# EAGLE board rotaryDisplayBoard (EAGLE 9.6.2)
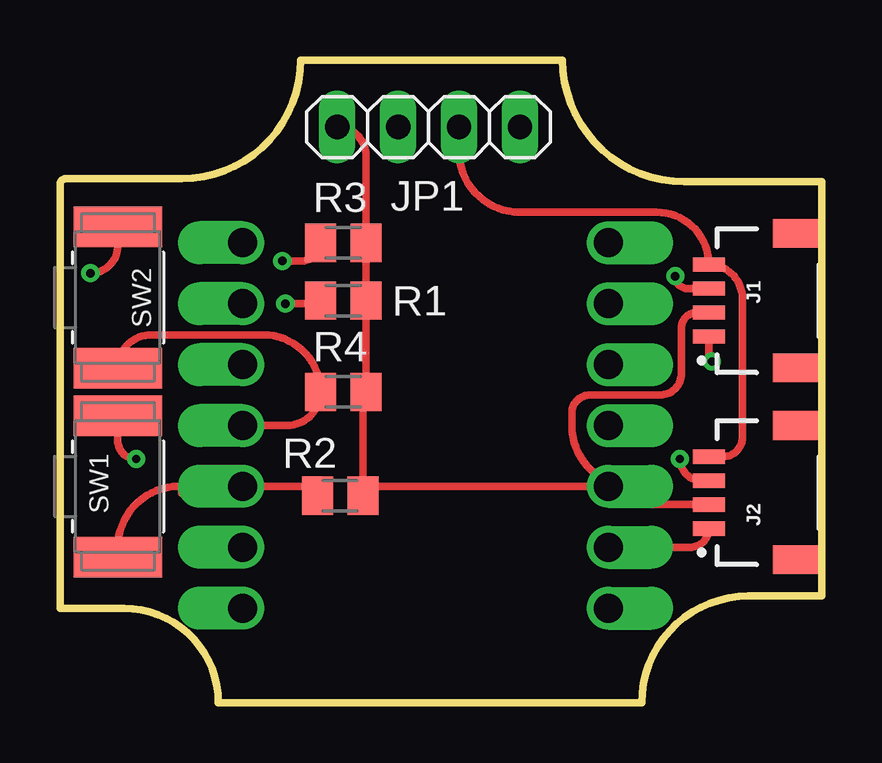
[diagram p0: board, top side]
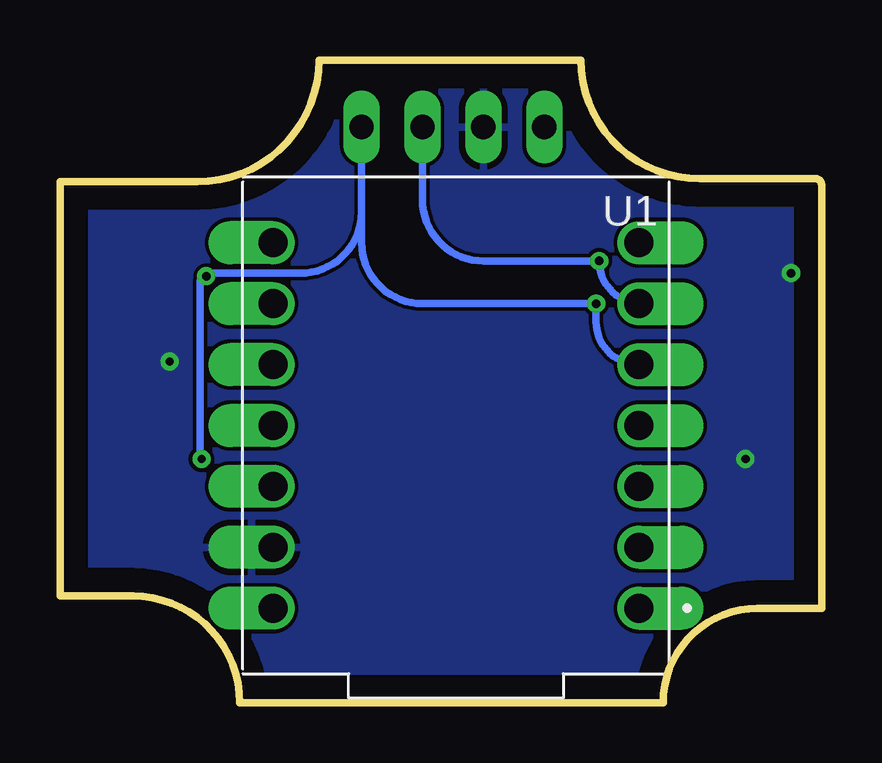
[diagram p1: board, bottom side, seen from below]

Size 31.75 x 26.8 mm. Coordinates in mm from the lower left corner, seen from the top.
Outline: 2.67,3.94 arc-90 6.6,0
Outline: 24.26,0 arc-90 28.7,4.45
Outline: 26.04,21.72 arc-90 20.96,26.8
Outline: 5.08,21.84 arc90 10.03,26.8
Outline: 2.67,3.94 0,3.94 0,21.59 arc-90 0.25,21.84 5.08,21.84
Outline: 2.67,3.94 arc-90 6.6,0
Outline: 26.04,21.72 31.75,21.72 31.75,4.45 28.7,4.45
Outline: 26.04,21.72 arc-90 20.96,26.8
Outline: 20.96,26.8 10.03,26.8
Outline: 10.03,26.8 arc-90 5.08,21.84
Outline: 24.26,0 arc-90 28.7,4.45
Outline: 24.26,0 6.6,0
Copper layers (1*16): Top 0.035mm / dielectric 1.5mm / Bottom 0.035mm
Design rules "default": minimum track width 6mil, minimum drill 0.35mm, track to track 6mil, track to pad 6mil, pad to pad 6mil, via to via 6mil, smd to smd 6mil, copper to edge 40mil, drill to drill 6mil, minimum pad ring 10mil, minimum via ring 8mil, stop-mask expansion 4mil, vias tented up to drill 0mil, thermal gap 10mil

## Footprints (pad centres in the part's own frame; a part is rotated, then mirrored left to right if it is on the bottom)
JST04_1MM_RA = smd 0.6 x 1.35: 1 -1.5,0; 2 -0.5,0; 3 0.5,0; 4 1.5,0 | smd 1.2 x 2: NC1 2.8,-3.675; NC2 -2.8,-3.675
1X04 = drill 1.016 long: 1 -3.81,0; 2 -1.27,0; 3 1.27,0; 4 3.81,0
M0805 = smd 1.3 x 1.6: 1 -0.95,0; 2 0.95,0
BTN_CK_KSS = smd 1.7 x 3.7: P$1 -2.95,0; P$2 2.95,0
MODULE_ADAFRUIT_QT_PY = drill 1.2 pad 1.8 offset: 1 -7.62,7.62; 2 -7.62,5.08; 3 -7.62,2.54; 4 -7.62,0; 5 -7.62,-2.54; 6 -7.62,-5.08; 7 -7.62,-7.62; 8 7.62,-7.62; 9 7.62,-5.08; 10 7.62,-2.54; 11 7.62,0; 12 7.62,2.54; 13 7.62,5.08; 14 7.62,7.62

## Placement (x,y rotation side)
J1  QWIIC_RIGHT_ANGLE  [JST04_1MM_RA]  27.05,16.76 90 top
J2  QWIIC_RIGHT_ANGLE  [JST04_1MM_RA]  27.05,8.76 90 top
JP1  [1X04]  15.37,24 0 top
R1  [M0805]  11.81,12.95 0 top
R2  [M0805]  11.68,8.64 0 top
R3  [M0805]  11.81,19.18 0 top
R4  [M0805]  11.81,16.76 0 top
SW1  [BTN_CK_KSS]  2.41,9.02 270 top
SW2  [BTN_CK_KSS]  2.41,16.89 270 top
U1  ADAFRUIT_QT_PY  [MODULE_ADAFRUIT_QT_PY]  15.24,11.56 180 bottom

## Library data of the parts
J1 J2 = SparkFun-Connectors; PROD_ID: CONN-13694
JP1 = pinhead
R1-R4 SW1 SW2 = adafruit
U1 = ADAFRUIT_QT_PY; AVAILABILITY: Not in stock; CHECK_PRICES: https://www.snapeda.com/parts/Adafruit%20QT%20Py/Adafruit+Industries/view-part/?ref=eda; DESCRIPTION: Castellated Pads - SAMD21 Dev Board with STEMMA QT; MF: Adafruit Industries; MP: Adafruit QT Py; PACKAGE: None; PRICE: None; SNAPEDA_LINK: https://www.snapeda.com/parts/Adafruit%20QT%20Py/Adafruit+Industries/view-part/?ref=snap

## Nets
5V: U1.14
GND: J1.1 J2.1 JP1.2 SW1.P$1 SW2.P$1 U1.13
N$3: J1.4 J2.4 JP1.3 R3.1 U1.6
N$4: J1.3 J2.3 JP1.4 R4.1 U1.5
N$8: J1.2 J2.2 JP1.1 R1.2 R2.2 R3.2 R4.2 U1.12
N$9: R2.1 SW1.P$2 U1.3
N$10: R1.1 SW2.P$2 U1.4

## Tracks (layer width: path | path; a pad name or v marks a point on that pad's centre or on a via)
GND  (via drill 0.35)
  Top 0.305: U1.13 26.27,6.48 arc90 J2.1 | 2.54,19.18 arc-90 2.41,19.3 SW2.P$1 2.41,19.05 arc-90 v1.27,17.91 | SW1.P$1 2.41,10.92 arc90 v3.18,10.16 | J1.1 27.05,14.35 arc90 v27.18,14.22
  pour Bottom: 1.27,21.72 5.08,21.72 arc90 10.16,26.8 20.32,26.8 arc90 25.4,21.72 31.75,21.72 31.75,5.21 29.21,5.21 arc90 24.13,0.13 6.35,0.13 arc90 2.54,3.94 0,3.94 0,21.72
N$3  (via drill 0.35)
  Top 0.305: R3.1 arc-90 10.1,18.41 v9.27,18.41 | JP1.3 16.64,22.99 arc90 19.18,20.45 24.87,20.45 arc-90 J1.4 arc-90 28.45,16.87 28.45,11.05 arc-90 27.66,10.26 J2.4
  Bottom 0.305: 7.49,16.64 arc90 v9.27,18.41 14.1,18.41 arc90 16.64,20.95 JP1.3 16.64,22.87 | 7.49,16.64 6.35,16.64 | 7.49,16.64 U1.6
N$4  (via drill 0.35)
  Top 0.305: R4.1 arc-90 10.73,16.64 v9.4,16.64 | v25.65,17.78 arc90 26.17,17.26 J1.3 | v25.84,10.16 arc90 26.74,9.26 J2.3
  Bottom 0.305: U1.5 arc90 9.4,15.87 v9.4,16.64 16.64,16.64 arc90 19.18,19.18 JP1.4 19.18,20.45 arc90 21.72,17.91 25.53,17.91 arc-90 v25.65,17.78 arc-90 25.91,17.53 25.91,10.16 v25.84,10.16
N$8
  Top 0.305: JP1.1 arc-90 12.76,22.8 R3.2 R4.2 R1.2 arc90 12.63,12.83 R2.2 arc-90 13.02,9.02 U1.12 | 24.13,9.02 24,9.02 23.88,9.02 | 23.88,9.02 U1.12 | J2.2 23.61,8.26 U1.12 | J1.2 26.55,16.26 arc90 25.91,15.62 25.91,13.72 arc-90 25.02,12.83 22.1,12.83 arc90 21.34,12.06 21.34,11.56 arc90 23.88,9.02
N$9
  Top 0.305: 2.82,6.48 arc90 SW1.P$2 2.41,6.48 arc-90 4.95,9.02 U1.3 | 5.08,8.73 5.08,9.02 U1.3 | 10.35,9.02 arc-90 R2.1 arc90 10.35,9.02 | U1.3 10.35,9.02
N$10
  Top 0.305: 6.35,11.56 U1.4 9.46,11.56 arc90 R1.1 arc90 8.48,15.34 3.81,15.34 arc90 SW2.P$2